# Altium PCB STM32WL_RevA.PcbDoc (part 1 of 2)
Units mm, origin at the board's own origin, x right, y up, seen from the top; angles counter-clockwise.
Board outline 40.25 x 54.25 mm, 4 copper layers (Top Layer, Int1 (GND), Int2 (PWR), Bottom Layer), stack 1.535 mm thick; 114 components, 68 nets, 361 pads, 205 vias.
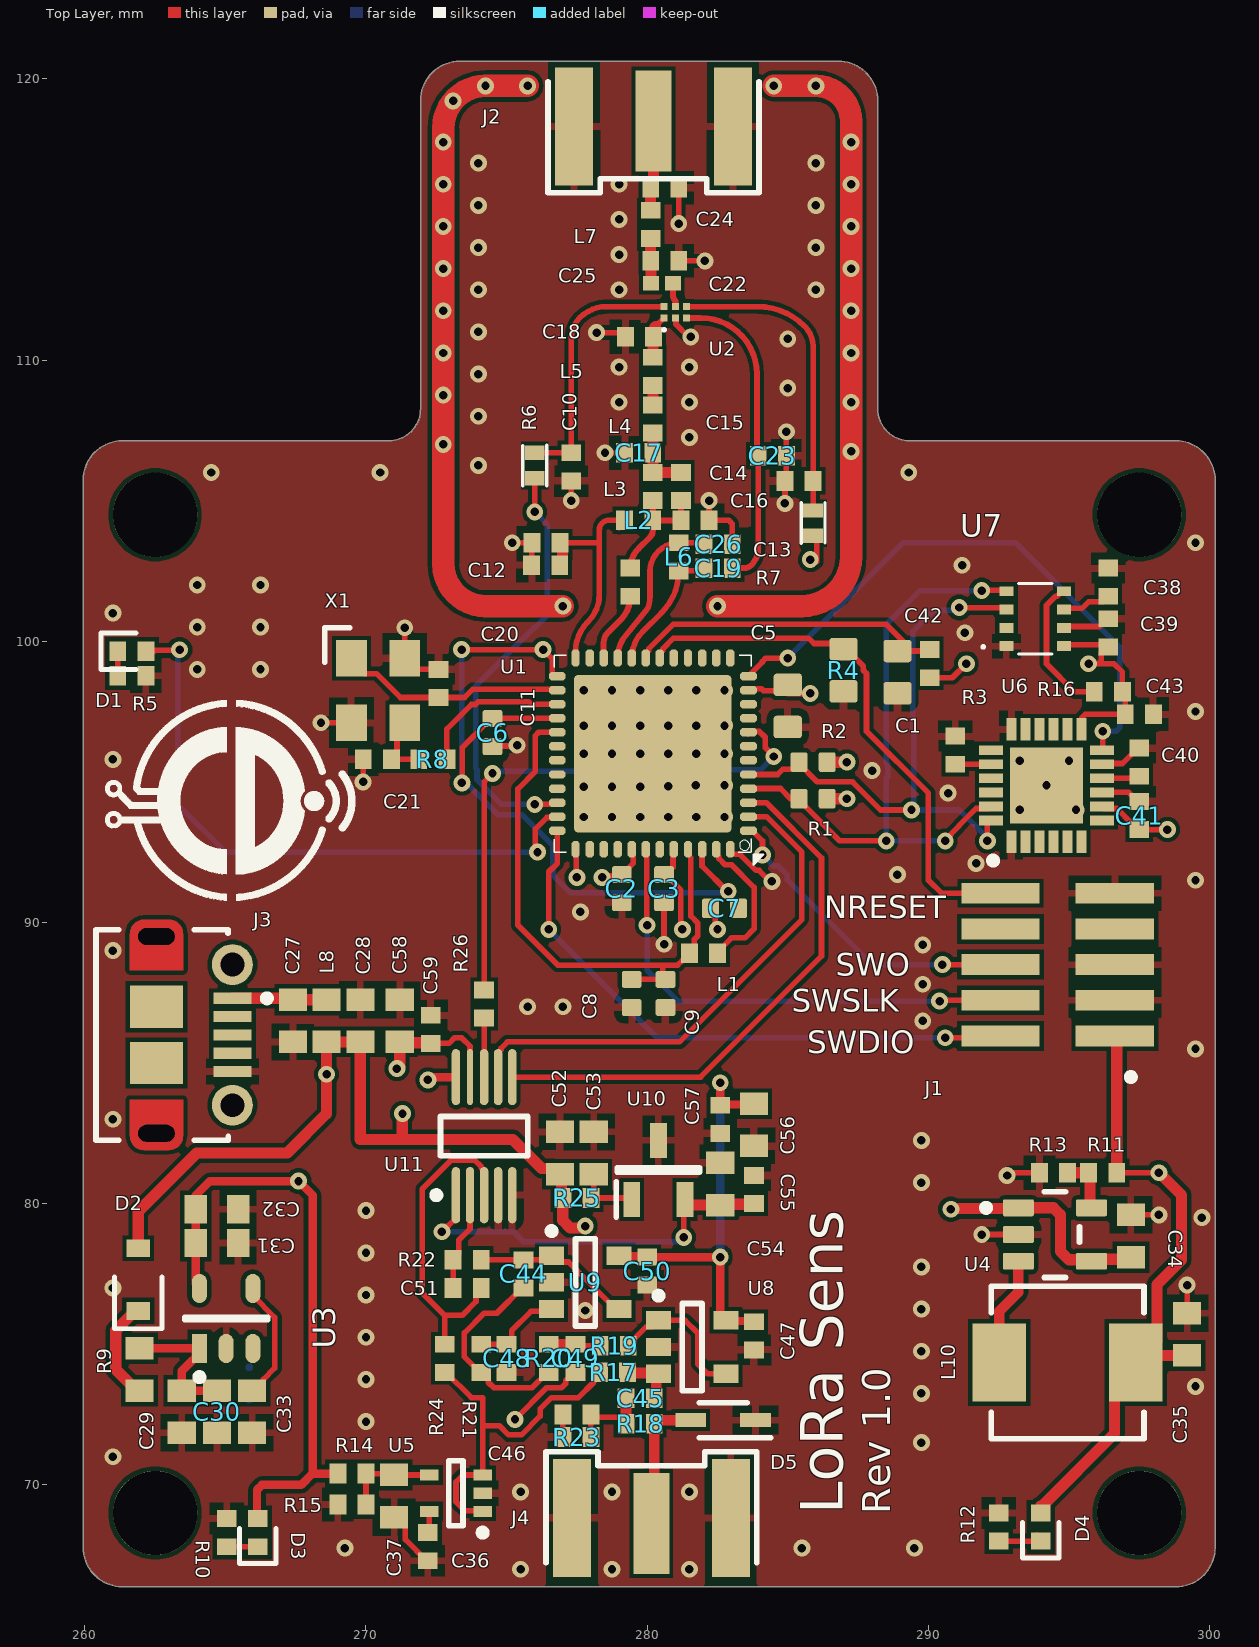
[diagram p0: Top Layer view]
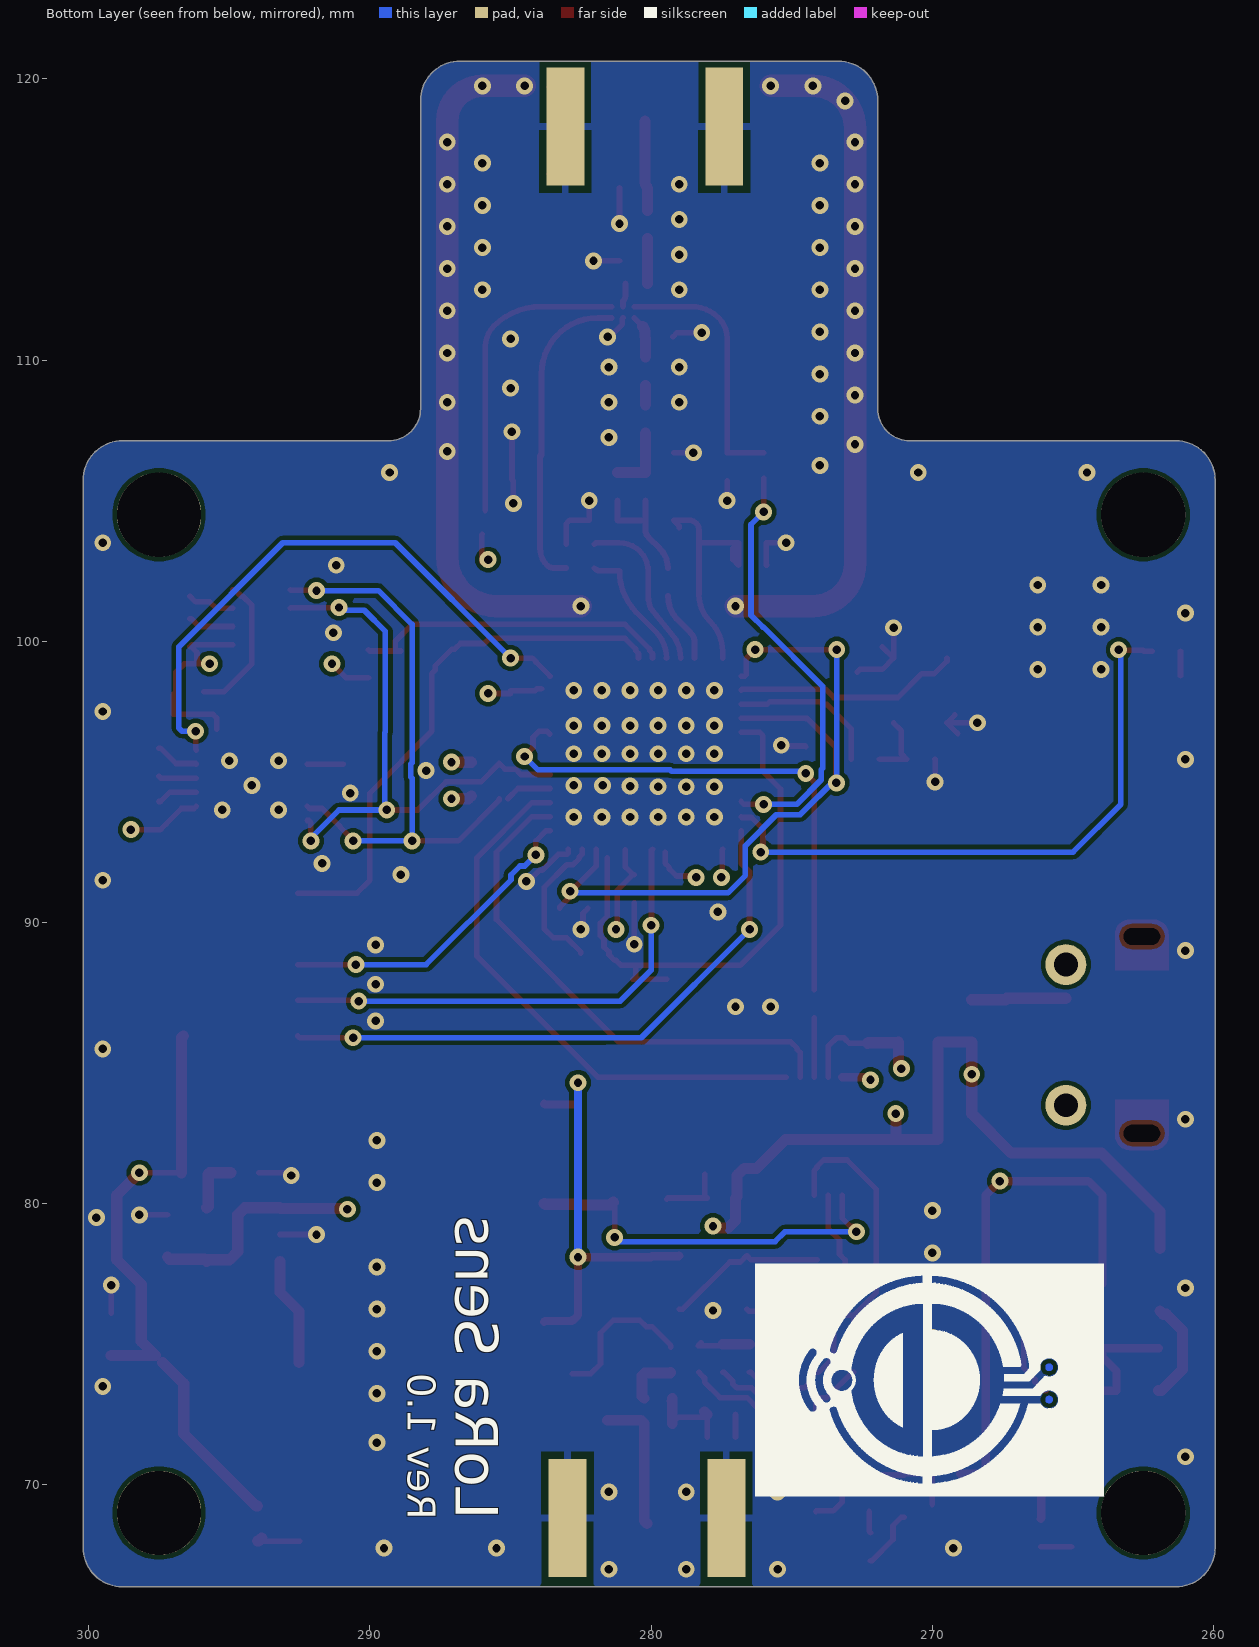
[diagram p1: Bottom Layer view, seen from below]
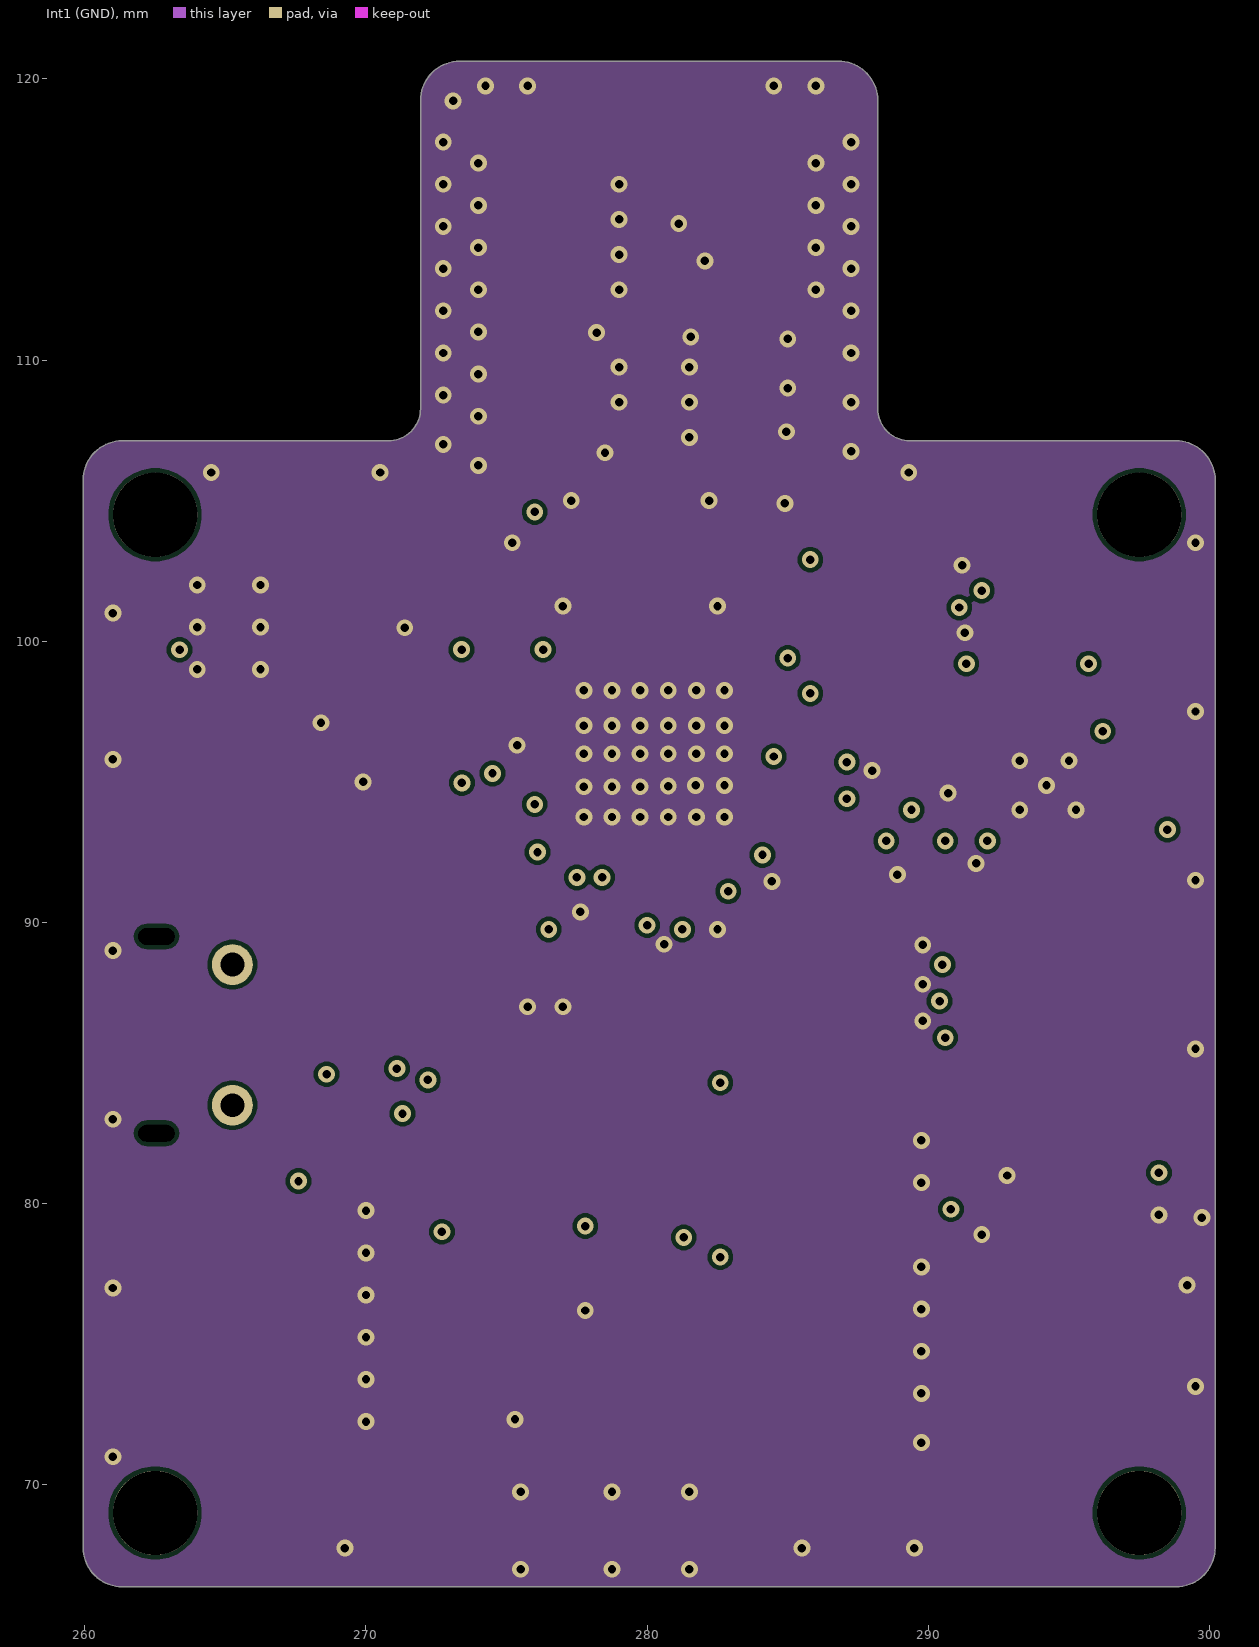
[diagram p2: Int1 (GND)]
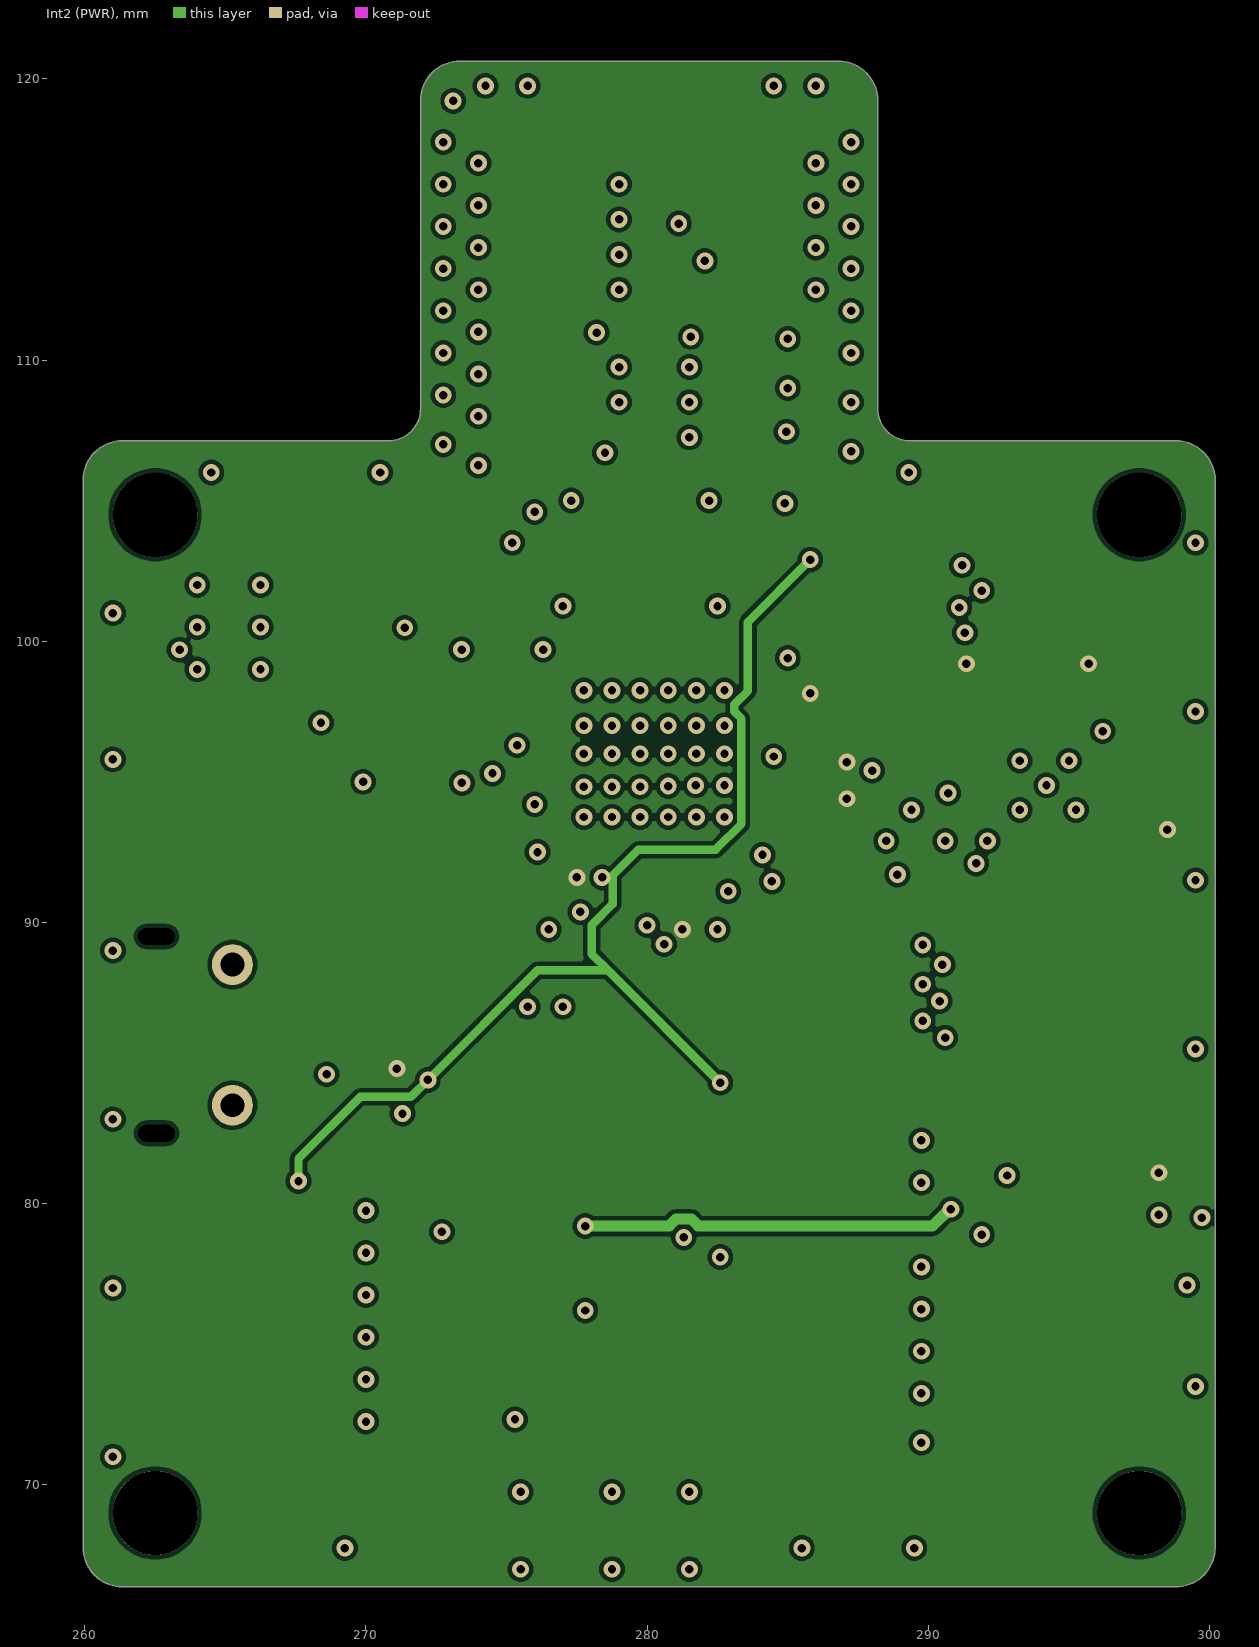
[diagram p3: Int2 (PWR)]
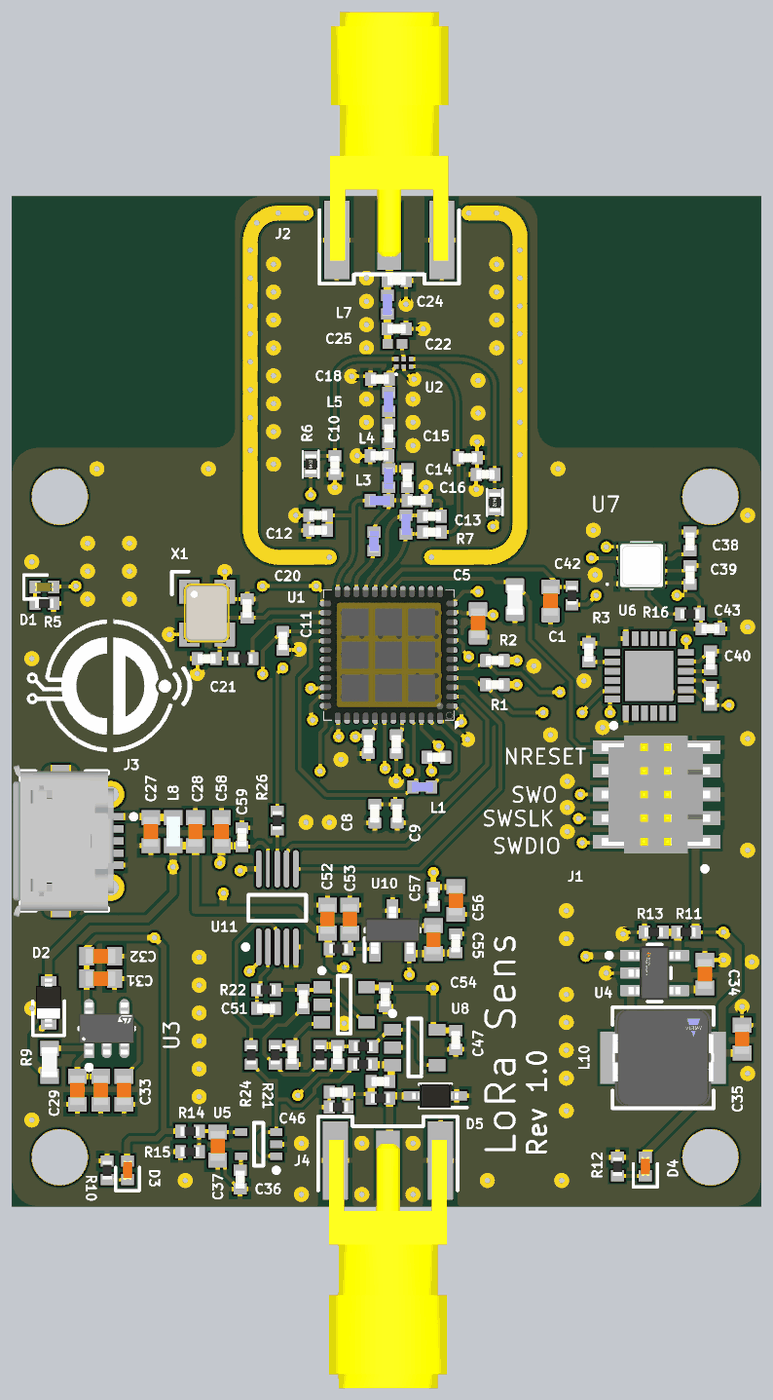
[diagram p5: 3D render of the assembled board from above, using the file's embedded part models]

## Layer stack, top to bottom
Top Solder: solder mask 0.0254, SM-001, Dk 4
Top Layer: signal copper 0.0175
Dielectric 1: prepreg 0.36, PP-017, Dk 4.6
Int1 (GND): signal copper 0.035
Dielectric 3: core 0.71, Core-039, Dk 4.6
Int2 (PWR): signal copper 0.035
Dielectric 5: prepreg 0.36, PP-017, Dk 4.6
Bottom Layer: signal copper 0.0175
Bottom Solder: solder mask 0.0254, SM-001, Dk 4

## Board outline
259.943,67.77 259.943,103 259.943,105.73 cw(c261.34,105.73) 261.34,107.127 270.8,107.127 ccw(c270.8,108.27) 271.943,108.27 271.943,119.23 cw(c273.34,119.23) 273.34,120.627 286.8,120.627 cw(c286.8,119.23) 288.198,119.23 288.198,108.27 ccw(c289.34,108.27) 289.34,107.127 298.8,107.127 cw(c298.8,105.73) 300.198,105.73 300.198,104.9 300.198,67.77 cw(c298.8,67.77) 298.8,66.373 261.34,66.373 cw(c261.34,67.77)

## Design rules (kind name [scope] priority, off if disabled: settings)
Clearance RF_CPWG_GND_GAP [InNetClass('RF_50_Ohm') vs InNet('GND')] p1: gap=0.15 ignorepadtopadclearanceinfootprint=FALSE
Clearance [All] p2: gap=0.15 ignorepadtopadclearanceinfootprint=FALSE
DiffPairsRouting [InDifferentialPairClass('All Differential Pairs')] p1: maxlimit=0.254 minlimit=0.254 mostfreqgap=0.254 toplayer_minwidth=0.2 toplayer_maxwidth=0.381 toplayer_prefwidth=0.2 midlayer1_minwidth=0.2 midlayer1_maxwidth=0.381 midlayer1_prefwidth=0.2 midlayer2_minwidth=0.2 midlayer2_maxwidth=0.381 midlayer2_prefwidth=0.2 bottomlayer_minwidth=0.2 bottomlayer_maxwidth=0.381 bottomlayer_prefwidth=0.2 maxuncoupledlength=12.7
HoleSize [All] p1: absolutevalues=TRUE maxlimit=3 minlimit=0.025 maxpercent=80.000 minpercent=20.000
MinimumSolderMaskSliver [All] p1: minsoldermaskwidth=0
PolygonConnect [All] p1: thpad.connectstyle=Direct thpad.reliefconductorwidth=0.254 thpad.reliefentries=4 thpad.polygonreliefangle="90 Angle" thpad.airgapwidth=0.254 smdpad.connectstyle=Relief smdpad.reliefconductorwidth=0.254 smdpad.reliefentries=4 smdpad.polygonreliefangle="90 Angle" smdpad.airgapwidth=0.254 via.connectstyle=Direct via.reliefconductorwidth=0.254 via.reliefentries=4 via.polygonreliefangle="90 Angle" via.airgapwidth=0.254
RoutingCorners RF_50_Ohm_CORNERS [InNetClass('RF_50_Ohm')] p1: cornerstyle=45-Degree minsetback=2.54 maxsetback=2.54
RoutingLayers RF_50_Ohm_LAYERS [InNetClass('RF_50_Ohm')] p1: top layer_v5=TRUE mid layer 1_v5=FALSE mid layer 2_v5=FALSE bottom layer_v5=FALSE
RoutingLayers RoutingLayers_1 [All] p2: top layer_v5=TRUE mid layer 1_v5=TRUE mid layer 2_v5=TRUE bottom layer_v5=TRUE
RoutingVias [All] p1: holewidth=0.3 width=0.6 viastyle="Through Hole" minholewidth=0.3 minwidth=0.6 maxholewidth=0.3 maxwidth=0.6
SilkToSolderMaskClearance [IsText] p1: minsilkscreentomaskgap=0.15 clearancetoexposedcopper=TRUE
SolderMaskExpansion [All] p1: expansion=0.102 istentingtop=FALSE
SupplyNets "Schematic Supply Nets_5" [InNet('GND')] p1: voltage=0.000
SupplyNets "Schematic Supply Nets_4" [InNet('VDC')] p2: voltage=0.000
SupplyNets "Schematic Supply Nets_3" [InNet('+3V3A')] p3: voltage=0.000
SupplyNets "Schematic Supply Nets_2" [InNet('+3V3')] p4: voltage=0.000
SupplyNets "Schematic Supply Nets_1" [InNet('+5V')] p5: voltage=0.000
SupplyNets "Schematic Supply Nets" [InNet('VCOM')] p6: voltage=0.000
Width RF_50_Ohm [InNetClass('RF_50_Ohm')] p1: maxlimit=0.8 minlimit=0.2 preferedwidth=0.35 toplayer_prefwidth=0.393 impedanceprofiledriven=TRUE impedanceprofileid={E45D36C0-3E41-45CE-B1B2-043B86276FE5} impedanceprofilevalue=50.000000 minimp=50.000000 maximp=50.000000 favimp=50.000000
Width Width_All_0p20mm [All] p2: maxlimit=0.8 minlimit=0.2 preferedwidth=0.2
24 further rules are at their usual default settings.

## Classes and differential pairs
net class RF_50_Ohm: NetC14_2 NetC15_2 NetC18_2 NetC22_1 NetC22_2 NetC24_2
component class stm32wl_Power: C27 C28 C29 C30 C31 C32 C33 C34 C35 C36 C37 D2 D3 D4 J3 L8 L10 R9 R10 R11 R12 R13 R14 R15 U3 U4 U5
component class STM32WL_ADC: C44 C45 C46 C47 C48 C49 C50 C51 C52 C53 C54 C55 C56 C57 C58 C59 D5 J4 R17 R18 R19 R20 R21 R22 R23 R24 R25 R26 U8 U9 U10 U11
component class STM32WL_Sensors: C38 C39 C40 C41 C42 C43 R16 U6 U7
component class STM32WL_MCU_IOs: B1 B2 C1 C2 C3 C5 D1 J1 R1 R2 R3 R4 R5
component class STM32WL_RF: C6 C7 C8 C9 C10 C11 C12 C13 C14 C15 C16 C17 C18 C19 C20 C21 C22 C23 C24 C25 C26 CN1 J2 L1 L2 L3 L4 L5 L6 L7 R6 R7 R8 U1 U2 X1
differential pair RFI_RX: +RFI_RX_P -RFI_RX_N

## Components (designator, comment, footprint, x,y, rotation, side; value= is the part's Value field where it differs from the comment)
C1 "100n" CAP_0603#1 288.9,98.9 r90 top
C2 "100n" CAP_0402#1 279.1,91.2 r90 top
C3 "100n" CAP_0402#1 280.6,91.2 r90 top
C5 "10u" CAP_0603#1 285,97.7 r90 top
C6 "4u7" CAP_0402#1 274.5,96.75 r90 top
C7 "100n" CAP_0402#1 282.75,90.5 r0 top
C8 "100n" CAP_0402#1 279.448,87.473 r90 top
C9 "470n" CAP_0402#1 280.652,87.473 r90 top
C10 "C0402_16V" CAP_0402#2 277.3,106.2 r90 top
C11 "68p" CAP_0402#2 276.4,103.5 r0 top locked
C12 "47n" CAP_0402#2 276.391,102.7 r0 top locked
C13 "100n" CAP_0402#2 285.4,105.7 r0 top locked
C14 "3p5" CAP_0402#2 281.2,105.5 r90 top locked
C15 "68p" CAP_0402#2 280.2,107.9 r90 top locked
C16 "5p5" CAP_0402#2 281.7,104.3 r180 top locked
C17 "5p5" CAP_0402#2 279.7,106.7 r0 top locked
C18 "C0402_16V" CAP_0402#2 279.725,110.825 r0 top locked
C19 "4p5" CAP_0402#2 282.525,102.6 r0 top locked
C20 "10p" CAP_0402#2 272.579,98.498 r270 top locked
C21 "10p" CAP_0402#2 270.404,95.798 r0 top locked
C22 "GRM1555C1H680JA01D" CAPC1005X55X25LL05T10 280.525,112.725 r0 top locked
C23 "C0402_16V" CAP_0402#2 284.45,106.6 r180 top locked
C24 "68p" CAP_0402#2 280.625,116.125 r180 top locked
C25 "68p" CAP_0402#2 280.625,113.525 r180 top locked
C26 "4p5" CAP_0402#2 282.525,103.45 r180 top locked
C27 "1u" CAP_0603#2 267.4,86.5 r90 top
C28 "1u" CAP_0603#2 269.8,86.5 r270 top
C29 "1u" CAP_0603#2 263.45,72.6 r90 top
C30 "100n" CAP_0603#2 264.7,72.6 r90 top
C31 "100n" CAP_0603#2 264.7,78.6 r180 top
C32 "1u" CAP_0603#2 264.7,79.8 r180 top
C33 "10n" CAP_0603#2 265.95,72.6 r90 top
C34 "4u7" CAP_0603#2 297.2,78.85 r270 top
C35 "10u" CAP_0603#2 299.2,75.35 r270 top
C36 "100n" CAP_0402#2 272.2,67.8 r270 top
C37 "22u" CAP_0603#2 271,69.6 r90 top
C38 "100n" CAP_0402#2 296.4,102.1 r270 top
C39 "100n" CAP_0402#2 296.4,100.3 r270 top
C40 "100n" CAP_0402#2 297.5,95.7 r270 top
C41 "10n" CAP_0402#2 297.5,93.8 r270 top
C42 "2n2" CAP_0402#2 290.95,96.125 r270 top
C43 "100n" CAP_0402#2 297.5,97.4 r180 top
C44 "100n" CAP_0402#2 275.6,77.5 r270 top
C45 "100n" CAP_0402#2 279.75,73.075 r180 top
C46 "150p" CAP_0402#2 277.5,72.5 r0 top
C47 "100n" CAP_0402#2 283.8,75.3 r270 top
C48 "150p" CAP_0402#2 275,74.5 r90 top
C49 "1n" CAP_0402#2 277.45,74.5 r90 top
C50 "100n" CAP_0402#2 280,77.6 r270 top
C51 "150p" CAP_0402#2 273.6,77 r0 top
C52 "10u" CAP_0603#2 276.9,81.8 r270 top
C53 "10u" CAP_0603#2 278.1,81.8 r270 top
C54 "10u" CAP_0603#2 282.6,80.7 r270 top
C55 "100n" CAP_0402#2 283.8,80.5 r270 top
C56 "10u" CAP_0603#2 283.8,82.8 r90 top
C57 "100n" CAP_0402#2 282.6,83 r90 top
C58 "10u" CAP_0603#2 271.2,86.5 r270 top
C59 "100n" CAP_0402#2 272.3,86.2 r270 top
D1 "GREEN" LED_0402_GREEN 261.674,99.647 r180 top
D2 "D_SCHOTTKY_SOD_323" SOD-323 261.9,77.3 r270 top
D3 "RED" LED_0402_RED 266.15,68.3 r270 top
D4 "RED" LED_0402_RED 294,68.5 r270 top
D5 "PESD3V3L1BA" SOD2512X110N 282.7,72.3 r180 top
J1 "FTSH-105-01-L-DV-K-TR" FP-FTSH-105-01-L-DV-K-TR-MFG 294.6,88.5 r90 top
J2 "SMA_T_9.52_NF" CO_SAMTEC_SMA-J-P-ST-EMI 280.225,120.4 r180 top
J3 "105017-0001" USB-MICRO-B_V 263.9,86 r270 top
J4 "SMA_T_9.52_NF" CO_SAMTEC_SMA-J-P-ST-EMI 280.15,66.725 r0 top
L1 "15u" IND_0402 282,88.9 r0 top
L2 "47n" IND_0402 279.7,104.3 r180 top locked
L3 "4n4" IND_0402 279.4,102.1 r90 top
L4 "3n4" IND_0402 280.2,105.5 r90 top locked
L5 "L0402" IND_0402 280.2,109.6 r90 top locked
L6 "12n" IND_0402 281.125,103 r270 top locked
L7 "8n7" IND_0402 280.125,114.825 r270 top locked
L8 "10n" IND_0603 268.6,86.5 r270 top
L10 "XAL4020-222MEC" FP-IHLP-2020CZ-FP_1_905x2-MFG 294.95,74.35 r0 top
R1 "4k7" CAP_0402#1 285.9,94.4 r0 top
R2 "4k7" CAP_0402#1 285.9,95.7 r0 top
R3 "2k2" RES_0402 290.05,99.2 r270 top
R4 "" RES_0603#1 286.983,98.967 r90 top value=1K
R5 "1k" RES_0402 261.674,98.772 r180 top
R6 "" R0402 276,106.25 r90 top locked value=100R
R7 "" R0402 285.9,104.2 r270 top value=100R
R8 "0R" RES_0402 272.379,95.798 r0 top locked
R9 "10R" RES_0603#2 261.95,74.1 r90 top
R10 "1k" RES_0402 265.05,68.3 r270 top
R11 "100k" RES_0402 296.2,81.1 r0 top
R12 "1k" RES_0402 292.5,68.5 r270 top
R13 "22k" RES_0402 294.45,81.1 r0 top
R14 "1k" RES_0402 269.5,70.4 r180 top
R15 "1k" RES_0402 269.5,69.3 r0 top
R16 "2k2" RES_0402 296.4,98.2 r0 top
R17 "2M2" RES_0402 278.8,74 r180 top
R18 "1k" RES_0402 279.75,72.175 r180 top
R19 "6k8" RES_0402 278.825,74.95 r0 top
R20 "22k" RES_0402 276.5,74.5 r90 top
R21 "12k" RES_0402 274.1,74.5 r270 top
R22 "1k" RES_0402 273.6,78 r0 top
R23 "2M2" RES_0402 277.5,71.7 r0 top
R24 "1k" RES_0402 272.8,74.5 r270 top
R25 "49R9" RES_0402 277.5,80.2 r0 top
R26 "0R" RES_0402 274.2,87.1 r270 top
U1 "STM32WLxx_QFN48" STM32WLxx_QFN48 280.2,96 r180 top
U2 "BGS12SN6" INF-TSNP-6-2_V 281,111.7 r90 top locked
U3 "LD3985M33R" FP-SOT23-5L-7049676-IPC_C 265.027,75.916 r90 top
U4 "TLV62569DBVR" FP-DBV0005A-MFG 294.5,78.9 r0 top
U5 "MCP6001T-E/LT" SC70-LT5_L 273.2,69.7 r180 top
U6 "MPU-6050" IS-QFN-24_V 294.2,94.875 r90 top
U7 "MOD-BME280" MODBME280 293.8,100.8 r180 top
U8 "MCP6001T-E/OT" SOT-23-OT5_L 281.6,74.9 r0 top
U9 "MCP6001T-E/OT" SOT-23-OT5_L 277.8,77.2 r0 top
U10 "REF3033AIDBZRG4" SOT95P237X112-3N 280.4,81.2 r90 top
U11 "ADC141S626CIMM/NOPB" MUB10A_M 274.2,82.4 r90 top locked
X1 "24MHz" XTAL_3225 270.429,98.248 r270 top locked

## Footprints (in the part's own frame and the unit in brackets; to place one, negate y for a bottom-side part, rotate by r counter-clockwise, add the part's x,y. Pads: shape width x height; smd on the part's side, far side on the other; paste and mask are expansions set on the pad)
CAP_0402#1 [mm]
  rrect25% 0.6x0.7 smd: 1(-0.5,0) 2(0.5,0)
  body extent -0.5,-0.26 0.5,0.26, height 0.37
CAP_0402#2 [mm]
  rect 0.6x0.7 smd: 1(-0.5,0) 2(0.5,0)
  body extent -0.5,-0.26 0.5,0.26, height 0.37
CAP_0603#1 [mm]
  rrect25% 0.8x1 smd: 1(-0.75,0) 2(0.75,0)
  body extent -0.8,-0.4 0.8,0.4, height 0.51
CAP_0603#2 [mm]
  rect 0.8x1 smd: 1(-0.75,0) 2(0.75,0)
  body extent -0.8,-0.4 0.8,0.4, height 0.51
CAPC1005X55X25LL05T10 [mm] "Chip Capacitor, 2-Leads, Body 1.00x0.50mm, IPC High Density"
  rect 0.56x0.52 smd: 1(-0.39,0) 2(0.39,0)
  body extent -0.53,-0.28 0.53,0.28, height 0.55
CO_SAMTEC_SMA-J-P-ST-EMI [mm] "SMA Jack CMS, Edge Mountt Receptacle 50Ohm, 5-Leads, Body 6.35x6.35x9.52mm, pitch 2.825mm"
  rect 1.27x3.6 smd mask+0.05: 1(0,1.9)
  rect 1.35x4.2 smd mask+0.05: 2(-2.825,2.1) 2(2.825,2.1)
  rect 1.35x4.2 smd far side mask+0.05: 2(-2.825,2.1) 2(2.825,2.1)
  silkscreen extent -3.75,0.5 3.75,4.45, body extent -3.17,-10.13 3.17,3.2, height 3.8
FP-DBV0005A-MFG [mm]
  rrect17% 1.1x0.6 smd paste+0 mask+0: 1(-1.3,0.95) 2(-1.3,0) 3(-1.3,-0.95) 4(1.3,-0.95) 5(1.3,0.95)
  silkscreen extent -2.57,-1.53 0.87,1.53, body extent -1.95,-1.78 1.95,1.78, height 0.25
FP-FTSH-105-01-L-DV-K-TR-MFG [mm]
  rect 0.74x2.79 smd paste+0 mask+0: 1(-2.54,-2.035) 2(-2.54,2.035) 3(-1.27,-2.035) 4(-1.27,2.035) 5(0,-2.035) 6(0,2.035) 7(1.27,-2.035) 8(1.27,2.035) 9(2.54,-2.035) 10(2.54,2.035)
  silkscreen extent -4.12,-2.73 -3.88,-2.48, body extent -3.34,-3.53 3.34,3.53, height 0.25
FP-IHLP-2020CZ-FP_1_905x2-MFG [mm]
  rect 1.905x2.79 smd paste+0 mask+0: 1(-2.425,0) 2(2.425,0)
  silkscreen extent -2.72,-2.72 2.72,2.72, body extent -3.48,-2.82 3.48,2.82, height 0.25
FP-SOT23-5L-7049676-IPC_C [mm]
  rect 1.038x0.532 smd paste+0 mask+0: 1(-1.066,0.95)
  rrect100% 1.038x0.532 smd paste+0 mask+0: 2(-1.066,0) 3(-1.066,-0.95) 4(1.066,-0.95) 5(1.066,0.95)
  silkscreen extent -2.21,-1.48 0.05,1.48, body extent -1.69,-1.58 1.69,1.58, height 0.25
IND_0402 [mm]
  rect 0.6x0.7 smd: 1(-0.5,0) 2(0.5,0)
  body extent -0.56,-0.26 0.56,0.26, height 0.67
IND_0603 [mm]
  rect 0.8x1 smd: 1(-0.75,0) 2(0.75,0)
  body extent -0.81,-0.37 0.81,0.37, height 0.87
INF-TSNP-6-2_V [mm] "TSNP, 6-Leads, Body 1.1x0.7mm, Pitch 0.4mm"
  rect 0.25x0.25 smd: 1(-0.2,0.4) 2(-0.2,0) 3(-0.2,-0.4) 4(0.2,-0.4) 5(0.2,0) 6(0.2,0.4)
  silkscreen extent -0.67,0.35 -0.58,0.45, body extent -0.35,-0.55 0.35,0.55, height 0.4
IS-QFN-24_V [mm] "QFN, 24-Leads, Body 4x4mm, Pitch 0.5mm, Thermal Pad 2.7x2.6mm"
  rect 0.8x0.35 smd: 1(-2,1.25) 2(-2,0.75) 3(-2,0.25) 4(-2,-0.25) 5(-2,-0.75) 6(-2,-1.25) 13(2,-1.25) 14(2,-0.75) 15(2,-0.25) 16(2,0.25) 17(2,0.75) 18(2,1.25)
  rect 0.35x0.85 smd mask+0.102: 7(-1.25,-1.975) 8(-0.75,-1.975) 9(-0.25,-1.975) 10(0.25,-1.975) 11(0.75,-1.975) 12(1.25,-1.975) 19(1.25,1.975) 20(0.75,1.975) 21(0.25,1.975) 22(-0.25,1.975) 23(-0.75,1.975) 24(-1.25,1.975)
  rect 2.7x2.6 smd: 25(0,0)
  silkscreen extent -2.8,1.77 -2.55,2.02, body extent -2,-2 2,2, height 0.95
LED_0402_GREEN [mm]
  rect 0.6x0.7 smd: A(-0.5,0) K(0.5,0)
  silkscreen extent -0.15,-0.65 1.1,0.65, body extent -0.51,-0.25 0.51,0.25, height 0.45
LED_0402_RED [mm]
  rect 0.6x0.7 smd: A(-0.5,0) K(0.5,0)
  silkscreen extent -0.15,-0.65 1.1,0.65, body extent -0.51,-0.25 0.51,0.25, height 0.45
MODBME280 [mm]
  rect 0.5x0.35 smd: 1(1.025,0.975) 2(1.025,0.325) 3(1.025,-0.325) 4(1.025,-0.975) 5(-1.025,-0.975) 6(-1.025,-0.325) 7(-1.025,0.325) 8(-1.025,0.975)
  silkscreen extent -0.6,-1.25 1.9,1.25, body extent -1.25,-1.25 1.25,1.25, height 0.93
MUB10A_M [mm] "TSSOP, 10-Leads, Body 3x3mm, Pitch 0.5mm, IPC Low Density"
  oval 2x0.3 smd: 1(-2.1,1) 2(-2.1,0.5) 3(-2.1,0) 4(-2.1,-0.5) 5(-2.1,-1) 6(2.1,-1) 7(2.1,-0.5) 8(2.1,0) 10(2.1,1)
  oval 2x0.2 smd: 9(2.1,0.5)
  silkscreen extent -2.22,-1.55 0.7,1.82, body extent -1.55,-1.55 1.55,1.55, height 1.09
R0402 [mm]
  rect 0.51x0.7 smd mask+0.05: 1(-0.45,0) 2(0.45,0)
  silkscreen extent -0.72,-0.43 0.72,0.43, body extent -0.52,-0.3 0.52,0.3, height 0.4
RES_0402 [mm]
  rect 0.6x0.7 smd: 1(-0.5,0) 2(0.5,0)
  body extent -0.5,-0.25 0.5,0.25, height 0.3
RES_0603#1 [mm]
  rrect25% 0.8x1 smd: 1(-0.75,0) 2(0.75,0)
  body extent -0.8,-0.43 0.8,0.43, height 0.52
RES_0603#2 [mm]
  rect 0.8x1 smd: 1(-0.75,0) 2(0.75,0)
  body extent -0.8,-0.43 0.8,0.43, height 0.52
SC70-LT5_L [mm] "SOT353, 5-Leads, Body 2x1.3mm, Pitch 0.65mm, Lead Span 2.1mm, IPC High Density"
  rect 0.65x0.4 smd: 1(-0.95,0.65) 2(-0.95,0) 3(-0.95,-0.65) 4(0.95,-0.65) 5(0.95,0.65)
  silkscreen extent -1.07,-1.15 0.25,1.52, body extent -0.67,-1.12 0.68,1.13, height 1.1
SOD2512X110N [mm]
  rect 1.1x0.5 smd: 1(-1.15,0) 2(1.15,0)
  silkscreen extent -1.7,-0.63 0.85,0.63, body extent -1.24,-0.62 1.24,0.63, height 0.93
SOD-323 [mm]
  rect 0.63x0.83 smd: A(-1.115,0) K(1.115,0)
  silkscreen extent -0.1,-0.85 1.75,0.85, body extent -1.3,-0.68 1.3,0.68, height 1.1
SOT95P237X112-3N [mm]
  rect 1.25x0.6 smd: 1(-1.05,0.95) 2(-1.05,-0.95) 3(1.05,0)
  silkscreen extent -1.68,-1.46 0.08,1.5, body extent -1.27,-1.46 1.27,1.46, height 1
SOT-23-OT5_L [mm] "SOT23, 5-Leads, Body 2.9x1.7mm, Pitch 0.95mm, Lead Span 2.8mm, IPC High Density"
  rect 0.9x0.65 smd: 1(-1.2,0.95) 2(-1.2,0) 3(-1.2,-0.95) 4(1.2,-0.95) 5(1.2,0.95)
  silkscreen extent -1.32,-1.55 0.35,1.95, body extent -0.9,-1.55 0.9,1.55, height 1.45
STM32WLxx_QFN48 [mm] "QFN48 7x7x0.55mm pitch 0.5mm"
  oct 0.6x0.3 smd mask+0.06: 1(-3.398,2.746) 2(-3.398,2.239) 3(-3.398,1.739) 4(-3.398,1.239) 5(-3.398,0.739) 6(-3.398,0.239) 7(-3.398,-0.261) 8(-3.398,-0.761) 9(-3.398,-1.261) 10(-3.398,-1.761) 11(-3.398,-2.261) 12(-3.398,-2.761) 25(3.398,-2.761) 26(3.398,-2.261) 27(3.398,-1.761) 28(3.398,-1.261) 29(3.398,-0.761) 30(3.398,-0.261) 31(3.398,0.239) 32(3.398,0.739) 33(3.398,1.239) 34(3.398,1.739) 35(3.398,2.239) 36(3.398,2.739)
  oct 0.3x0.6 smd mask+0.06: 13(-2.752,-3.399) 14(-2.252,-3.399) 15(-1.752,-3.399) 16(-1.252,-3.399) 17(-0.752,-3.399) 18(-0.252,-3.399) 19(0.248,-3.399) 20(0.748,-3.399) 21(1.248,-3.399) 22(1.748,-3.399) 23(2.248,-3.399) 24(2.748,-3.399) 37(2.748,3.399) 38(2.248,3.399) 39(1.748,3.399) 40(1.248,3.399) 41(0.748,3.399) 42(0.248,3.399) 43(-0.252,3.399) 44(-0.752,3.399) 45(-1.252,3.399) 46(-1.752,3.399) 47(-2.252,3.399) 48(-2.752,3.399)
  rrect5% 5.6x5.6 smd paste-3 mask+0.08: 49(0,0)
  silkscreen extent -3.95,-3.5 3.5,3.96, body extent -3.51,-3.51 3.51,3.51, height 0.78
USB-MICRO-B_V [mm] "USB, MICRO B, Body 7.491x4.695 mm, Pitch 0.65 mm"
  rect 0.4x1.35 smd: 1(-1.3,1.35) 2(-0.65,1.35) 3(0,1.35) 4(0.65,1.35) 5(1.3,1.35)
  round 1.45 hole 0.85: 6(-2.5,1.35) 7(2.5,1.35)
  rrect50% 0x0 hole 0.6 slot 1.3 at 90 deg: 8(-3.5,-1.35) 11(3.5,-1.35)
  rect 1.5x1.9 smd: 9(-1,-1.35) 10(1,-1.35)
  Top Layer circle w0.5: c3.6,-0.9 r0.25
  Top Layer circle w0.5: c3.6,-1.8 r0.25
  Top Layer circle w0.5: c-3.6,-0.9 r0.25
  Top Layer circle w0.5: c-3.6,-1.8 r0.25
  Top Layer region: -2.3,-2.3 -2.3,-0.4 -3.6,-0.4 -3.6,-2.3
  Top Layer region: 2.3,-0.4 2.3,-2.3 3.6,-2.3 3.6,-0.4
  Top Layer region: 3.6,-0.9 3.6,-1.8 4.1,-1.8 4.1,-0.9
  Top Layer region: -3.6,-1.8 -3.6,-0.9 -4.1,-0.9 -4.1,-1.8
  silkscreen extent -3.75,-3.5 3.75,2.7, body extent -4.1,-3.9 4.1,1.5, height 2.67
XTAL_3225 [mm]
  rect 1.3x1.1 smd: 1(-1.15,-0.95) 2(1.15,-0.95) 3(1.15,0.95) 4(-1.15,0.95)
  silkscreen extent -2.23,-1.89 -1,-1, body extent -1.6,-1.28 1.6,1.22, height 0.61

## Part data
C1 C10 C11 C12 C13 C14 C15 C16 C17 C18 C19 C20 C21 C23 C24 C25 C36 C38 C39 C40 C41 C42 C43 C44 C45 C46 C47 C48 C49 C50 C51 C55 C57 C59: library part CAP_0402_16V, "Capacitor SMD 0402 16V"
C2 C3 C6 C7 C8 C9: library part CAP_0201_16V, "Capacitor SMD 0201 16V"
C5 C27 C28 C29 C30 C31 C32 C33 C34 C35 C37 C52 C53 C54 C56 C58: library part CAP_0603_16V, "Capacitor SMD 0603 16V"
C22: library part CMP-2008-04406-1, Manufacturer=Murata, Part Number=GRM1555C1H680JA01D
C26: library part CAP_0402_16V
D1: library part LED_0402_GREEN, "LED 0402 GREEN SMD"
D2: "Diode Schottky SMD SOD-323"
D3 D4: library part LED_0402_RED, "LED 0402 RED SMD"
D5: "TVS Diode (Bi-directional)", Manufacturer_Name=Nexperia, Mouser Part Number=N/A, Datasheet Link=https://datasheet.datasheetarchive.com/originals/distributors/Datasheets-26/DSA-502681.pdf, Height=1.1mm, Manufacturer_Part_Number=PESD3V3L1BA, Mouser Price/Stock=https://www.mouser.co.uk/ProductDetail/Nexperia/PESD3V3L1BA?qs=vHuUswq2%252BswBNSPO0jzUyg%3D%3D
J1: library part CMP-2000-06293-2, "CONN HEADER SMD 10POS 1.27MM", Color=Black, Current Rating=1.75A, Max Operating Temperature=125°C, Min Operating Temperature=-55°C, Package Quantity=550, Connector Type="Male Pin", Contact Material=Bronze, Contact Mating Length=0.12inch, Contact Plating=Gold, Depth=3.43mm, Gender=Male, Housing Color=Black, Housing Material=Polymer, Lead Free="Lead Free", Length=6.35mm, Max Current Rating=1.75A, Mount="Surface Mount", Number of Contacts=10, Number of Positions=10, Number of Rows=2, Orientation=Straight, Packaging="Tape and Reel", Pitch=1.27mm, Radiation Hardening=No, REACH SVHC="No SVHC", Row Spacing=0.05inch, Termination=Solder
J2 J4: "SMA End Launch Jack 1.0 mm Board, 50 ohm", Manufacturer="COAX CONNECTORS LTD", Manufacturer_Part_Number=30-462-D3-1.1mm
J3: library part CMP-2000-05827-1, "Micro-USB B Receptacle, Right Angle, Bottom Mount, Surface Mount, with Solder Tabs, -30 to 85 degC, 5-Pin USB, RoHS, Tape and Reel", Manufacturer=Molex, Package Description="5-Leads USB, Micro B, Body 7.5 x 5 mm, Pitch 0.65 mm", Package Reference=MICRO-B, Package Version="Rev. F, 12/2012", Standard Package=1, Voltage - Max=30V, 3D Model=105017-0001.stp, Catalog Drawings=1050170001, Category=Connectors,Interconnects, Circuits=5, Connector Type=USB-microB, Datasheet URL=http://www.molex.com/elqNow/elqRedir.htm?ref=http://www.molex.com/webdocs/datasheets/pdf/en-us/1050170001_IO_CONNECTORS.pdf, Datasheet Version=03/2016, Family=USB,DVI,HDMIConnectors, Featured Product=Micro-USBConnectorsUSBConnectors, Features=Shielded,SolderRetention, Gender=Receptacle, Ingress Protection=-, Manufacturer URL=http://www.molex.com/, Mating Products=WM17145-ND-CABLEMICROUSBBTOSTDA1.0MWM17147-ND-CABLEMICROUSBBTOSTDA2.0MWM17146-ND-CABLEMICROUSBBTOSTDA1.5M, Mounting Technology=SurfaceMount, Mounting Type=BoardCutout,SurfaceMount,RightAngle, Number of Contacts=5, Online Catalog=Molex-MicroUSB, Other Names=WM1399DKR, Package URL=http://www.molex.com/pdm_docs/sd/1050170001_sd.pdf, Packaging=Digi-Reel®, PCN Assembly/Origin=ResinSupplier21/Oct/2015, RoHS Information=1050170001CertofCompliance, Series=-, Specifications=-
L1 L2 L4 L5 L6 L7: library part IND_0402, "Inductor SMD 0402"
L3: library part IND_0402, "Inductor SMD 0402 LQW15AN4N4G80D"
L8: library part IND_0603, "Inductor SMD 0603"
L10: library part CMP-11268-000134-1, "Fixed Inductors 2.2uH Shld 20% 5.5A 38.7mOhms AECQ2", Case/Package=SMD/SMT, DC Resistance (DCR)=38.7mR, Inductance=2.2uH, Inductance Tolerance=20%, Max DC Current=5.5A, Max Operating Temperature=125°C, Min Operating Temperature=-40°C, Package Quantity=1000, Saturation Current=5.6A, Self Resonant Frequency=52MHz, Test Frequency=100kHz, Core Material=Composite, Height=2.1mm, Lead Free="Contains Lead", Length=4.3mm, Mount="Surface Mount", Packaging="Tape and Reel", RMS Current (Irms)=5.5A, RoHS Compliant=Yes, Series=XAL4020, Shielding=Shielded, Termination=SMD/SMT, Tolerance=20%, Width=4.3mm
R1 R2 R9: library part RES_0603, "Resistor SMD 0603"
R3 R5 R8 R10 R11 R12 R13 R14 R15 R16 R17 R18 R19 R20 R21 R22 R23 R24 R25 R26: library part RES_0402, "Resistor SMD 0402"
R4: library part MCD-00061, "Resistor,1K,0402,1%,1/16W", Manufacturer=YAGEO, Manufacturer_Part_Number=RC0402FR-071KL, Package=R0402, ComponentLink1Description=Datasheet, ComponentLink1URL=http://tunmcdsvn.tun.st.com/Component_Datasheet_Library/Trunk/Resistors/Yageo_Resistor_RC0402-series, ECCN_EU=NEC, ECCN_US=EAR99, Internal_Part_Number=MCD-00061, Part_Type=Resistor, Provided_By=SUBCO, Status=Released
R6 R7: library part MCD-00119, "Resistor,100R,0402,1%,1/16W", Manufacturer=YAGEO, Manufacturer_Part_Number=RC0402FR-07100RL, Package=R0402, ComponentLink1Description=Datasheet, ComponentLink1URL=http://tunmcdsvn.tun.st.com/Component_Datasheet_Library/Trunk/Resistors/Yageo_Resistor_RC0402-series, ECCN_EU=NEC, ECCN_US=EAR99, Internal_Part_Number=MCD-00119, Part_Type=Resistor, Provided_By=SUBCO, Status=Released
U1: "HQDC : Verified April, 25 2019", Manufacturer=STMicroelectronics, Manufacturer_Part_Number=STM32WLE5CC
U2: library part CMP-1088-00016-1, "Wideband RF SPDT Switch, 0.1 to 6 GHz, TSNP-6, Reel, Green", Frequency ( f ) Range="0.1 to 6 GHz", Manufacturer=Infineon, Supply Voltage Range="1.8 - 3.5", ComponentLink1Description="Manufacturer URL", ComponentLink1URL=http://www.infineon.com/, ComponentLink2Description=Datasheet, ComponentLink2URL=http://www.infineon.com/dgdl/BGS12SN6_2014-05-23.pdf?folderId=db3a30431f848401011fcbf2ab4c04c4&fileId=db3a30433f1b26e8013f2db58bc03856, ComponentLink3Description="Package Specification", ComponentLink3URL=http://www.infineon.com/dgdl/TSNP-6-2-Package_Overview.pdf?folderId=db3a304327b89750012805e1379a6124&fileId=db3a30433c6612b1013c6bcb02293ba1, DatasheetVersion="Rev. 1.2", Green=TRUE, Halogen-free=TRUE, Insertion Loss @1GHz="0.25 dB", Isolation @1GHz="40 dB", Mounting Technology="Surface Mount", PackageDescription="6-Pin Thin Small Non Leaded Package, 1.1 x 0.7 mm Body, 0.4 mm Pitch", PackageReference=TSNP-6-2, PackageVersion=Jan-13, Packing="Tape and Reel", PartNumber=BGS12SN6, Pmax="30 dBm", Switch Type=SPDT
U3: library part CMP-0244-00328-3, Case/Package=SOT-23, Dropout Voltage=60mV, Input Bias Current=85µA, Max Input Voltage=6V, Max Junction Temperature (Tj)=125°C, Max Output Current=150mA, Min Current Limit=300mA, Min Input Voltage=2.5V, Min Operating Temperature=-40°C, Min Output Voltage=3.3V, Output Voltage Accuracy=2%, Quiescent Current=150µA, Accuracy=2%, Height=1.3mm, Lead Free="Lead Free", Length=3mm, Lifecycle Status=Production, Max Operating Temperature=125°C, Max Supply Voltage=6V, Min Supply Voltage=2.5V, Mount="Surface Mount", NexarPartId=526998, Number of Channels=1, Number of Outputs=1, Number of Pins=5, Number of Regulators=1, Output Current=150mA, Output Type=Fixed, Output Voltage=3.3V, Packaging="Cut Tape (CT)", Polarity=Positive, Radiation Hardening=No, RoHS=Compliant, Schedule B="8542390000, 8542390000|8542390000, 8542390000|8542390000|8542390000, 8542390000|8542390000|8542390000|8542390000", Width=1.75mm
U4: library part CMP-04918-000387-1, "IC REG BUCK ADJ 2A SOT23-5", Case/Package=SOT-23-5, Max Input Voltage=5.5V, Max Operating Temperature=125°C, Min Input Voltage=2.5V, Min Operating Temperature=-40°C, Min Output Voltage=600mV, Output Current=2A, Switching Frequency=1.5MHz, Max Output Voltage=5.5V, Mount="Surface Mount", Output Configuration=Positive, Output Type=Adjustable, Packaging="Cut Tape", RoHS Compliant=Yes, Synchronous Rectifier=Yes
U5: library part CMP-0187-00463-3, "None", Case/Package=SC, Input Bias Current=1pA, Input Offset Voltage (Vos)=4.5mV, Max Operating Temperature=125°C, Max Supply Voltage=6V, Min Operating Temperature=-40°C, Min Supply Voltage=1.8V, Nominal Supply Current=100uA, Operating Supply Voltage=5.5V, Output Current=23mA, Package Quantity=3000, Power Supply Rejection Ratio (PSRR)=86dB, Voltage Gain=112dB, Amplifier Type="GENERAL PURPOSE", Bandwidth=1MHz, Common Mode Rejection Ratio=60dB, Contact Plating=Tin, Gain Bandwidth Product=1MHz, Height=1mm, Input Offset Voltage-Max=4.5mV, Lead Free="Lead Free", Length=2.25mm, Mount="Surface Mount", Number of Amplifiers=1, Number of Channels=1, Number of Circuits=1, Number of Elements=1, Number of Pins=5, Packaging="Tape and Reel", Radiation Hardening=No, REACH SVHC="No SVHC", RoHS Compliant=Yes, Slew Rate=0.6V/µs, Slew Rate-Nom=0.6V/µs, Supply Current=100uA, Technology=CMOS, Unity Gain Bandwidth Product=1MHz, Width=1.35mm
U6: library part CMP-1753-00002-2, "3-Axis Gyroscope, Accelerometer and a Digital Motion Processor(TM) (DMP), 2.375 to 3.46 V, -40 to 85 degC, 24-Pin QFN, RoHS, Tape and Reel", Manufacturer=InvenSense, Standard Package=5,000, Category=Sensors,Transducers, Datasheet URL=http://datasheet.octopart.com/MPU-6050-InvenSense-datasheet-14421344.pdf, Datasheet Version="Rev. 3.3, 05/2012", Dynamic Catalog=MPU-6000™Series, Family=Multifunction, Featured Product=MPU-60506-Axis,IntegratedI²CSolution, Manufacturer URL=http://www.invensense.com/, Online Catalog=MPU-6000™Series, Other Names="1428-1007-2 / MPU6050", Output Type=Digital, Sensor Type=MotionTracking, Unit PriceUSD=Digital
U7: "Integrated Circuit", Manufacturer_Name="Olimex Ltd.", Mouser Part Number=909-MOD-BME280, Datasheet Link=https://eu.mouser.com/datasheet/2/306/BME280-1620794.pdf, Height=1mm, Manufacturer_Part_Number=MOD-BME280, Mouser Price/Stock=https://www.mouser.co.uk/ProductDetail/Olimex-Ltd/MOD-BME280?qs=%252B6g0mu59x7K82sEO3yPPgg%3D%3D
U8 U9: library part CMP-0187-00458-3, "None", Case/Package=SOT-23, Input Bias Current=1pA, Input Offset Voltage (Vos)=4.5mV, Max Operating Temperature=125°C, Max Supply Voltage=6V, Min Operating Temperature=-40°C, Min Supply Voltage=1.8V, Nominal Supply Current=100uA, Operating Supply Voltage=5.5V, Output Current=23mA, Package Quantity=3000, Power Supply Rejection Ratio (PSRR)=86dB, Voltage Gain=112dB, Amplifier Type="GENERAL PURPOSE", Bandwidth=1MHz, Common Mode Rejection Ratio=60dB, Contact Plating=Tin, Gain Bandwidth Product=1MHz, Height=1.3mm, Input Offset Voltage-Max=4.5mV, Lead Free="Lead Free", Length=3.1mm, Mount="Surface Mount", Number of Amplifiers=1, Number of Channels=1, Number of Circuits=1, Number of Elements=1, Number of Pins=5, Operating Supply Current=100uA, Output Current per Channel=23mA, Packaging="Tape and Reel", Radiation Hardening=No, REACH SVHC="No SVHC", RoHS Compliant=Yes, Slew Rate=0.6V/µs, Slew Rate-Nom=0.6V/µs, Supply Current=100uA, Technology=CMOS, Unity Gain Bandwidth Product=1MHz, Voltage=6V, Width=1.8mm
U10: "Integrated Circuit", Manufacturer_Name="Texas Instruments", Mouser Part Number=595-REF3033AIDBZRG4, Arrow Part Number=REF3033AIDBZRG4, Arrow Price/Stock=https://www.arrow.com/en/products/ref3033aidbzrg4/texas-instruments, Datasheet Link=https://www.ti.com/lit/ds/symlink/ref3030.pdf?ts=1639296719724, Height=1.12mm, Manufacturer_Part_Number=REF3033AIDBZRG4, Mouser Price/Stock=https://www.mouser.co.uk/ProductDetail/Texas-Instruments/REF3033AIDBZRG4?qs=sSOk4GDDv7x3KhdEagQjiQ%3D%3D
U11: library part CMP-0054-00477-2, "14-Bit, 50 kSPS to 250 kSPS, Differential Input, Micro Power A/D Converter, 10-pin Mini SOIC, Pb-Free", Manufacturer="National Semiconductor", PackageTopMarking=ZXTT*X94C, PowerWise=Y, Code_JEDEC=MO-187-BA, ComponentLink1Description="ADC141S626 Datasheet", ComponentLink1URL=http://www.national.com/ds/AD/ADC141S626.pdf, ComponentLink2Description="ADC141S626 Web Page", ComponentLink2URL=http://www.national.com/pf/AD/ADC141S626.html, ComponentLink3Description="MUB10A Package Page", ComponentLink3URL=http://www.national.com/packaging/folders/mub10a.html, CompType="ADC IC", DatasheetVersion=Jan-2009, PackageDescription="Mini-SO, Molded, .118 x .118 x .034in Body, 10 Lead, .0197in Pitch", PackageReference=MUB10A, PackageVersion="revB, Jul-2003", PinCount=10, RevisionNote="Component URLs added", RoHS=Y
X1: library part TSX-3225_24.0000MF15X-AC, "Crystal SMD 24MHz 10PPM 7pF 3225", Load Capacitance=7pF, Manufacturer=Epson, Manufacturer Number="TSX-3225 24.0000MF15X-AC", ESR=40R, Type=XTAL

## Free pads (board coordinates)
  round 3 hole 3: MH(262.5,69) MH(262.5,104.5) MH(297.5,69) MH(297.5,104.5)

## Via types
v1: diameter 0.6, hole 0.3, Top Layer to Bottom Layer, 205 vias

## Nets (pads, with @x,y where several pads share a name; then routed paths per layer and width w, separated by ;. In a path a pad name is that pad's centre, name@x,y a point inside that pad or via, vN(x,y) a via of type N, cw(c..) or ccw(c..) an arc to the next point about the centre after c; other vN are vias at no path point)
+3V3: C3.2 C5.2 C35.2 C39.2 C41.2 C43.2 C58.2 C59.2 D4.A J1.1 L10.2 R1.2 R2.2 R3.2 R11.2 R16.2 U1.11 U1.37 U1.44 U6.8 U6.13 U7.8 U11.9 | length 45.7
  Top Layer w0.2: C59.2@272.3,85.7 272.95,85.7 273.15,85.9 273.4,85.9 273.7,85.6 U11.9@273.7,84.5 ; U1.37@277.452,92.601 277.476,92.577 277.476,91.624 v1(277.5,91.6) ; C3.2@280.6,91.7 C3.2@280.65,91.7 ; U1.44@280.918,92.585 280.918,91.968 C3.2@280.65,91.7 ; v1(281.25,89.75) 281.2,89.8 281.2,91.15 C3.2@280.65,91.7 ; 283.898,98.303 284.065,98.303 284.126,98.243 C5.2@285,98.243 ; C5.2@285,98.143 v1(285.8,98.143) ; R3.2@290.05,98.7 290.85,98.7 v1(291.35,99.2) ; U7.8@294.875,99.875 296.325,99.875 C39.2@296.4,99.8 296.35,99.8 296.15,99.6 296.15,99.317 296.033,99.2 ; U6.13@295.45,96.875 295.45,97.275 295.575,97.4 C43.2@297,97.4 297,98.1 R16.2@296.9,98.2 296.9,98.9 296.6,99.2 296.033,99.2 ; v1(295.7,99.2) 296.033,99.2 ; U6.8@296.175,94.125 296.25,94.05 296.704,94.05 297.25,93.504 297.25,93.5 297.45,93.3 C41.2@297.5,93.3 v1(298.5,93.3) ; R11.2@296.7,81.1 v1(298.2,81.1)
  Top Layer w0.4: v1(271.1,84.8) 271.2,84.9 C58.2@271.2,85.75 271.225,85.725 272.275,85.725 C59.2@272.3,85.7 ; R1.2@286.4,94.5 286.5,94.4 v1(287.1,94.4) ; R2.2@286.4,95.7 v1(287.1,95.7) ; D4.A@294,69.25 294.05,69.25 296.623,71.823 296.623,73.598 L10.2@297.376,74.35 ; J1.1@296.635,85.96 296.7,85.895 R11.2@296.7,81.1 ; v1(298.2,81.1) 299,80.3 299,78 298.128,77.128 298.128,75.103 297.626,74.6 C35.2@299.2,74.6
+3V3A: C2.2 C31.2 C32.2 C47.1 C50.1 C56.2 C57.2 D3.A R7.2 R14.2 U1.41 U3.5 U8.5 U9.5 U11.10 | length 81.6
  Top Layer w0.2: v1(278.4,91.6) 278.45,91.65 279.1,91.65 279.35,91.9 279.35,91.95 279.5,92.1 U1.41@279.5,92.5 ; v1(285.8,102.9) 285.875,102.825 286.025,102.825 286.025,103.775 R7.2@286,103.8
  Top Layer w0.3: U3.5@263.95,77.15 C31.2@263.95,78.6 C32.2@263.95,79.8 263.95,80.3 264.45,80.8 v1(267.6,80.8) 268.1,80.3 268.1,70.4 ; D3.A@266.15,68.8 266.125,68.825 266.125,69.824 266.301,70 267.7,70 268.1,70.4 ; R14.2@269,70.4 268.1,70.4 ; v1(272.2,84.4) 272.3,84.5 U11.10@273.2,84.5 ; U9.5@279,78.15 279.025,78.125 279.975,78.125 C50.1@280,78.1 v1(282.6,78.1) 282.6,76.025 U8.5@282.775,75.85 ; v1@282.6,84.355 C57.2@282.6,83.5 282.625,83.525 283.775,83.525 C56.2@283.8,83.55 ; U8.5@282.8,75.85 U8.5@282.775,75.85 ; C47.1@283.8,75.8 283.775,75.825 282.8,75.825 U8.5@282.775,75.85
  Int2 (PWR) w0.2: v1(278.4,91.6) 278.473,91.673 278.773,91.673
  Int2 (PWR) w0.3: v1(267.6,80.8) 267.6,81.6 269.8,83.8 271.6,83.8 v1(272.2,84.4) 276.1,88.3 278.6,88.3 ; v1(282.6,84.3) 278.6,88.3 ; v1(285.8,102.9) 283.584,100.684 283.584,98.235 283.098,97.749 283.098,97.501 283.35,97.249 283.35,93.501 282.436,92.587 279.687,92.587 278.773,91.673 278.773,90.648 278.025,89.901 278.025,88.876 278.6,88.301 278.6,88.3
  Bottom Layer w0.3: v1(282.6,78.1) v1(282.6,84.3)
+5V: C28.2 C34.2 C52.2 D2.A L8.2 R25.1 U4.1 U4.4 | length 49.3
  Top Layer w0.4: D2.A@261.9,78.415 261.9,79.719 263.981,81.8 267.2,81.8 268.6,83.2 v1(268.6,84.6) L8.2@268.6,85.75 C28.2@269.8,85.75 269.8,82.281 271.292,82.281 ; v1(271.3,83.2) 271.292,83.192 271.292,82.281 ; v1(277.8,79.2) 277.746,79.2 277.682,79.136 277.264,79.136 277,79.4 R25.1@277,80.2 276.95,80.25 276.95,81 C52.2@276.9,81.05 276.7,81.25 276.25,81.25 275.219,82.281 271.292,82.281 ; v1(290.8,79.8) 290.825,79.825 293.175,79.825 U4.1@293.2,79.85 294.45,79.85 294.7,79.6 294.7,78.3 295,78 295.75,78 U4.4@295.8,77.95 295.875,78.025 297.125,78.025 C34.2@297.2,78.1
  Int2 (PWR) w0.4: v1(277.8,79.2) 280.781,79.2 281.031,79.45 281.569,79.45 281.819,79.2 290.146,79.2 290.746,79.8 v1(290.8,79.8)
+5V_Flt: C29.2 C30.2 R9.2 U3.1 | length 5
  Top Layer w0.3: R9.2@261.95,74.85 263.95,74.85 263.95,74.55 263.75,74.35 263.45,74.05 C29.2@263.45,73.35 C30.2@264.7,73.35
ADC_IN+: C51.1 R22.1 U11.2 | length 3.5
  Top Layer w0.2: C51.1@273.1,77 R22.1@273.1,78 273.3,78.2 273.3,78.7 273.7,79.1 U11.2@273.7,80.3
ADC_IN-: C51.2 R24.1 U11.3 | length 11.7
  Top Layer w0.2: R24.1@272.8,75 272.8,76.025 ; R24.1@272.85,75 R24.1@273.05,75.2 ; C51.2@274.1,77 273.913,76.813 273.913,76.513 273.425,76.025 272.8,76.025 ; U11.3@274.2,80.3 274.2,81.177 274.1,81.277 274.1,81.316 273.866,81.55 273.034,81.55 272,80.516 272,76.825 272.8,76.025
ADC_SCK: R26.2 U11.8 | length 2.1
  Top Layer w0.2: U11.8@274.2,84.5 R26.2@274.2,86.6
ADC_VRef: C54.2 C55.2 U10.2 U11.1 | length 14.2
  Top Layer w0.2: v1(272.7,79) 272.7,79.083 272.817,79.2 272.923,79.2 273.2,79.477 U11.1@273.2,80.3 ; v1(281.3,78.8) 281.3,80 U10.2@281.35,80.05
  Top Layer w0.4: U10.2@281.35,80.05 281.45,79.95 C54.2@282.6,79.95 282.625,79.975 283.775,79.975 C55.2@283.8,80
  Bottom Layer w0.2: v1(272.7,79) 275.243,79 275.593,78.65 281.183,78.65 281.3,78.767 v1(281.3,78.8)
ADC_VRef_VIN: C53.2 R25.2 U10.1 | length 2.4
  Top Layer w0.2: C53.2@278.1,81.05 278.1,80.3 R25.2@278,80.2 279.4,80.2 U10.1@279.45,80.15
BME_VDDIO: C38.2 U7.6 | length 1.7
  Top Layer w0.2: U7.6@294.875,101.175 295.475,101.175 295.7,101.4 296.2,101.4 C38.2@296.4,101.6
BOOT0: C1.2 R3.1 U1.19 | length 11.8
  Top Layer w0.2: U1.19@279.952,99.399 279.952,99.565 280.052,99.665 280.052,99.727 280.924,100.6 288.5,100.6 289.1,100 C1.2@289.1,99.65 ; C1.2@289.193,99.65 C1.2@288.9,99.65 290,99.65 R3.1@290.05,99.7
BUCK_FB: R11.1 R13.2 U4.5 | length 2
  Top Layer w0.4: R13.2@294.95,81.1 R11.1@295.7,81.1 295.75,81.05 295.75,79.9 U4.5@295.8,79.85
BUCK_SW: L10.1 U4.3 | length 3.9
  Top Layer w0.381: L10.1@292.525,74.35 292.525,76.175 293.2,76.85 U4.3@293.2,77.95
FE_CTRL2: R6.1 U1.34 | length 15.3
  Top Layer w0.2: v1(276,94.2) 276.7,94.2 U1.34@276.8,94.3 ; v1(276,104.6) R6.1@276,105.8
  Bottom Layer w0.2: v1(276,94.2) 274.822,94.2 273.95,95.072 273.95,95.428 273.9,95.478 273.9,98.4 276,100.5 276.028,100.5 276.45,100.922 276.45,104.15 v1(276,104.6)